# EAGLE board schema (EAGLE 7.2.0)
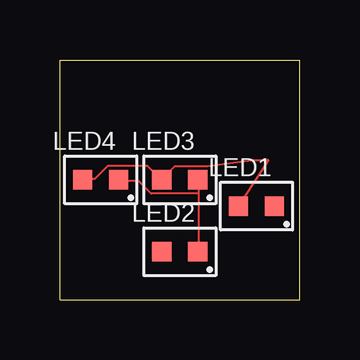
[diagram p0: board, top side]

Size 10 x 10 mm. Coordinates in mm from the lower left corner, seen from the top.
Outline: 0,0 10,0 10,10 0,10 0,0
Copper layers (1*16): Top 0.035mm / dielectric 0.75mm / Bottom 0.035mm
Design rules "default": minimum track width 3mil, minimum drill 5mil, track to track 3mil, track to pad 3mil, pad to pad 3mil, via to via 3mil, smd to smd 0mil, copper to edge 5mil, drill to drill 8mil, minimum pad ring 5mil, minimum via ring 2.5mil, stop-mask expansion 4mil, vias tented up to drill 0mil, thermal gap 10mil

## Footprints (pad centres in the part's own frame; a part is rotated, then mirrored left to right if it is on the bottom)
LED = smd 0.8 x 0.8: ANODE -0.75,0; CATHODE 0.75,0

## Placement (x,y rotation side)
LED1  LTST-C191KRKT  [LED]  8.2,3.9 0 top
LED2  LTST-C191KRKT  [LED]  5,2 0 top
LED3  LTST-C191KRKT  [LED]  5,5 0 top
LED4  LTST-C191KRKT  [LED]  1.7,5 0 top

## Library data of the parts
LED1-LED4 = Andres_Project

## Nets
N$0: LED1.ANODE LED3.ANODE LED4.ANODE
N$1: LED2.CATHODE LED3.CATHODE LED4.CATHODE

## Tracks (layer width: path | path; a pad name or v marks a point on that pad's centre or on a via)
N$0
  Top 0.076: LED4.ANODE 0.99,5.03 1.45,5.03 1.98,5.56 3.66,5.56 4.19,5.03 LED3.ANODE 4.27,5.03 4.8,5.56 6.17,5.56 8.01,5.83 8.69,5.83 LED1.ANODE
N$1
  Top 0.076: 5.79,4.42 5.79,4.95 LED3.CATHODE | 5.79,4.42 5.79,2.06 LED2.CATHODE | 5.79,4.42 3.81,4.42 3.28,4.95 2.52,4.95 LED4.CATHODE